# Altium PCB HardwareTutorial - Carrier_Board_Interface.PcbDoc
Units mm, origin at the board's own origin, x right, y up, seen from the top; angles counter-clockwise.
Board outline 50 x 50 mm, 2 copper layers (Top Layer, Bottom Layer); 30 components, 41 nets, 132 pads, 16 vias.
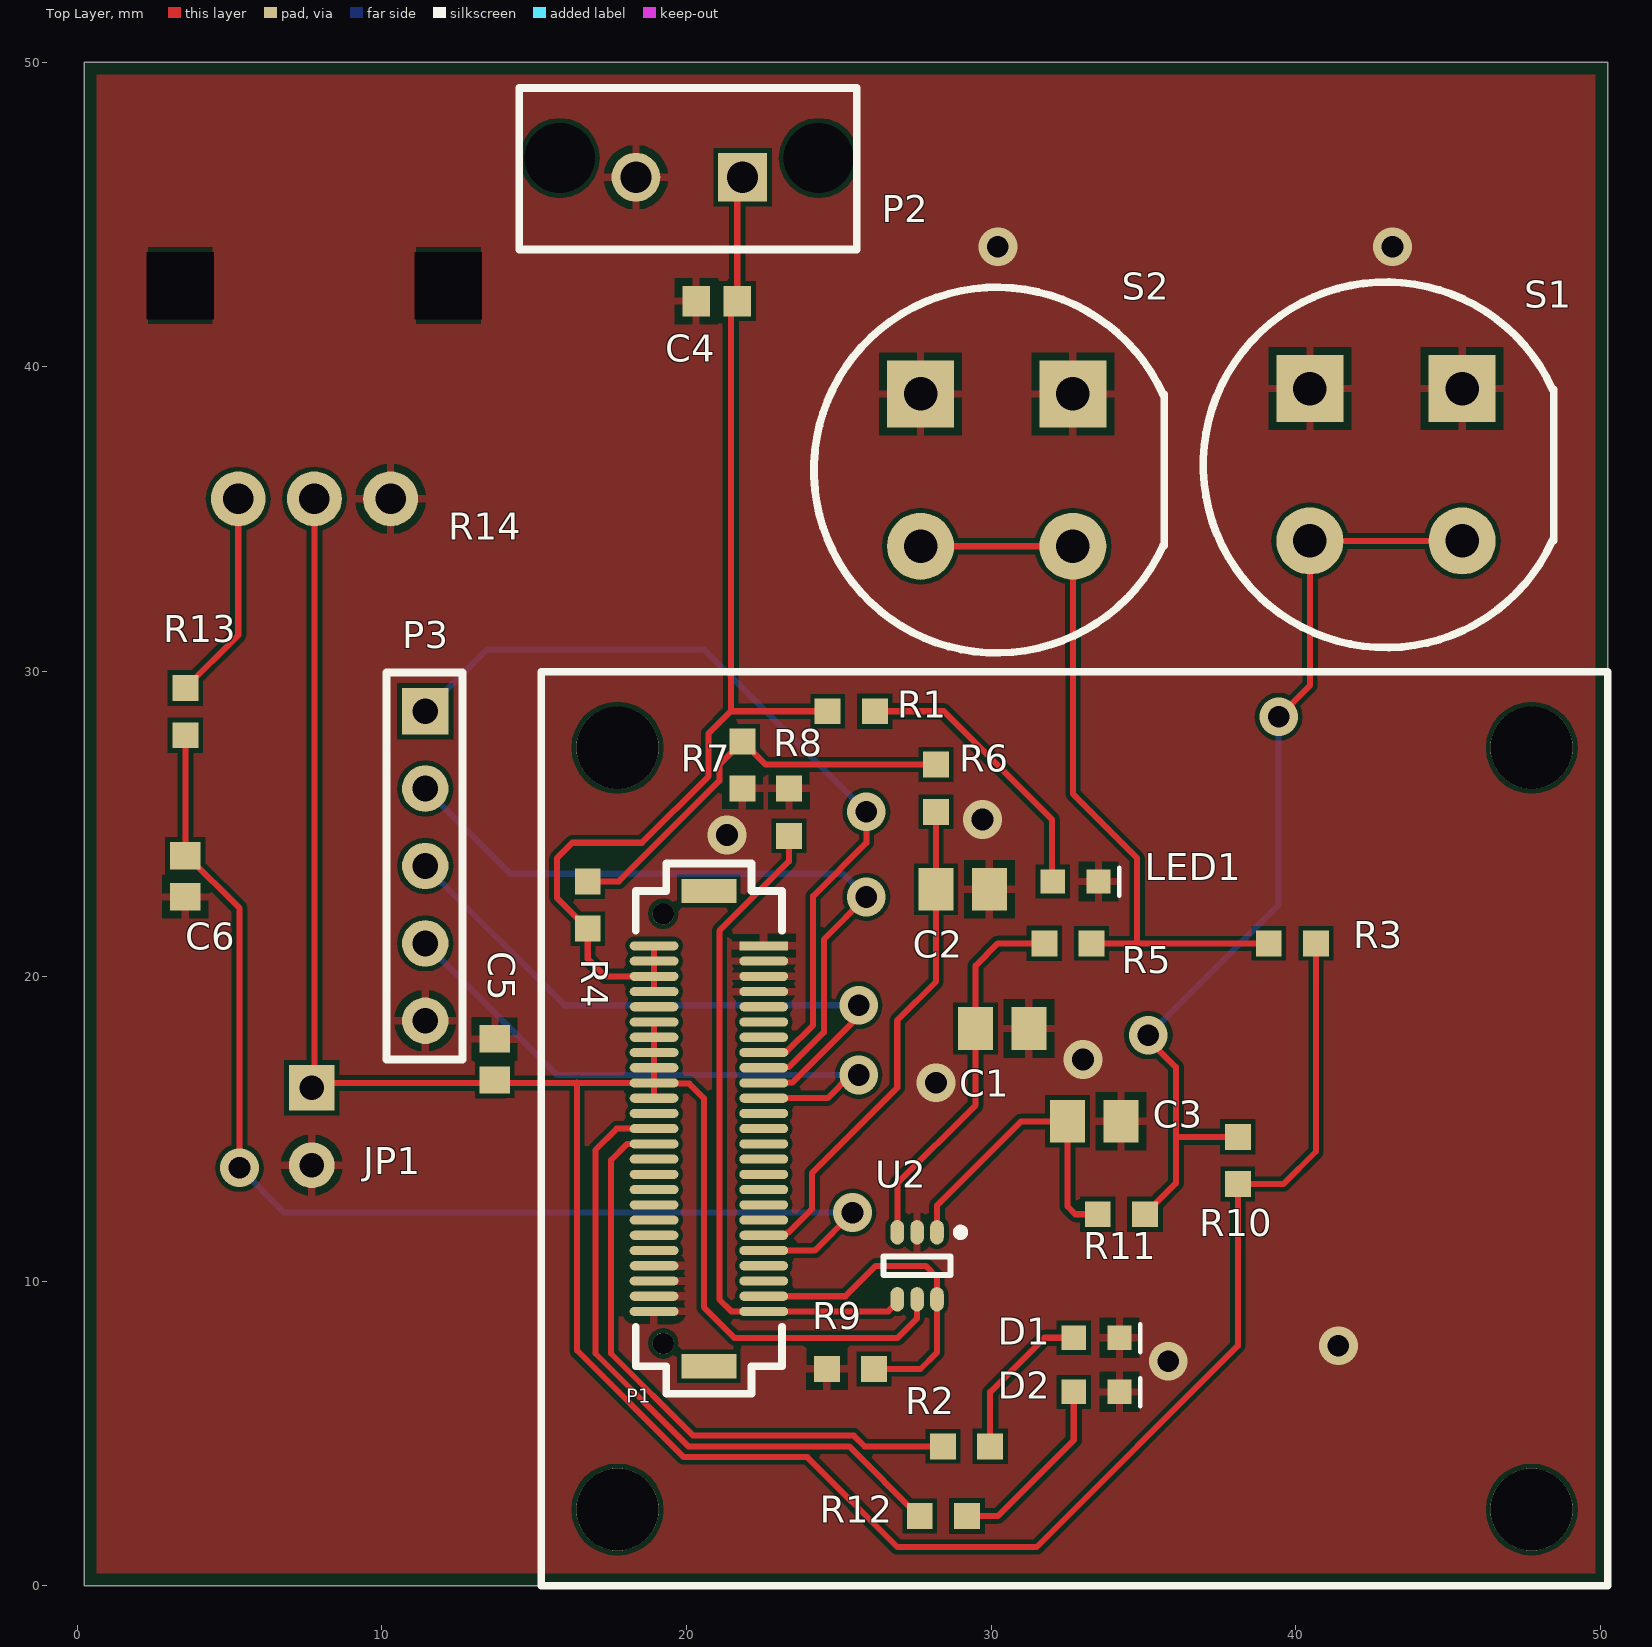
[diagram p0: Top Layer view]
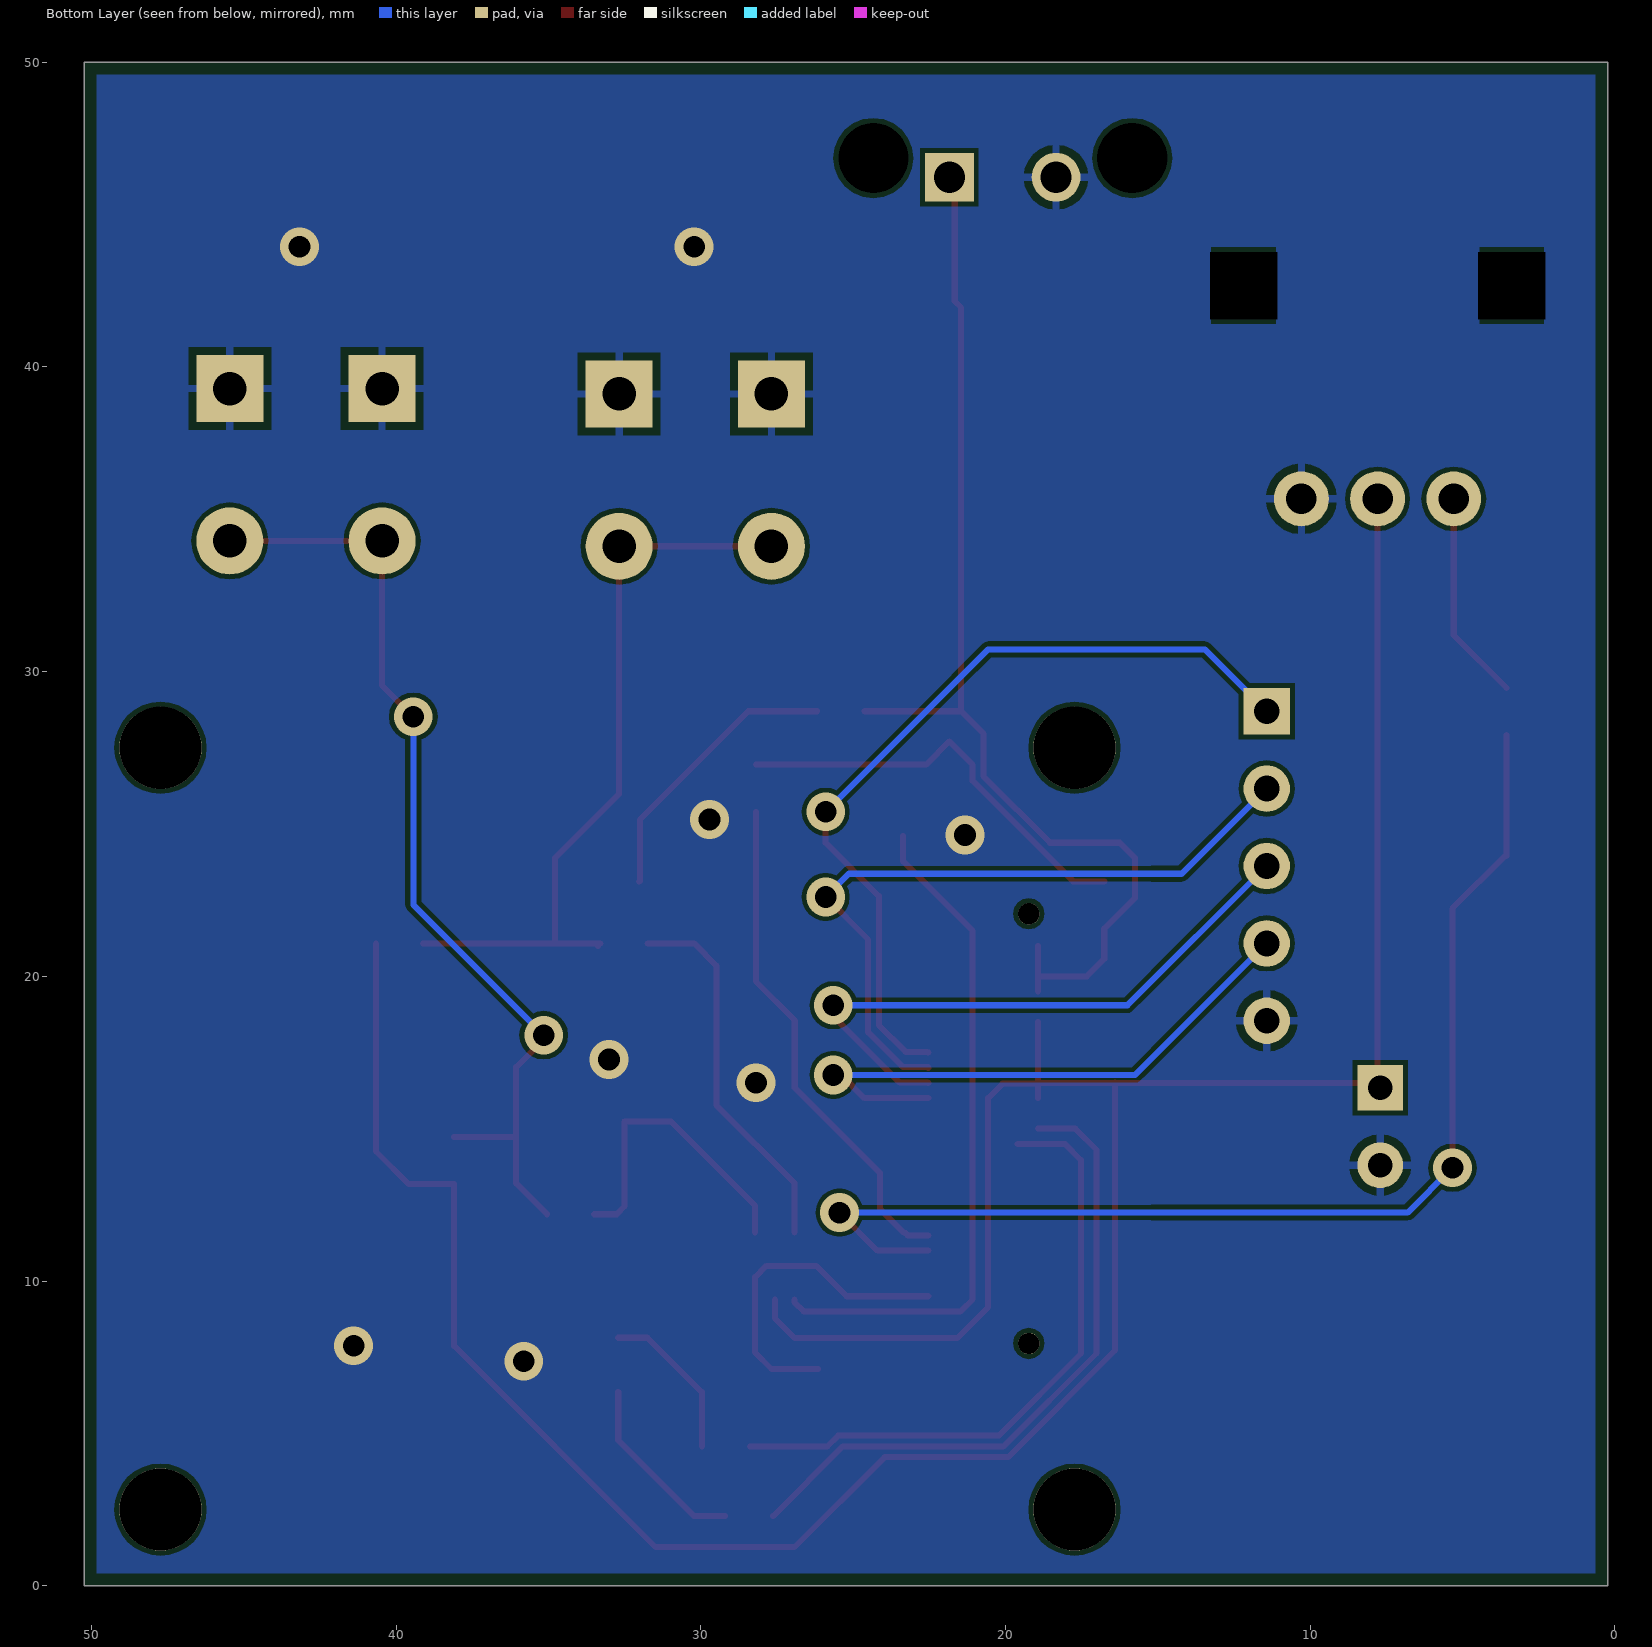
[diagram p1: Bottom Layer view, seen from below]
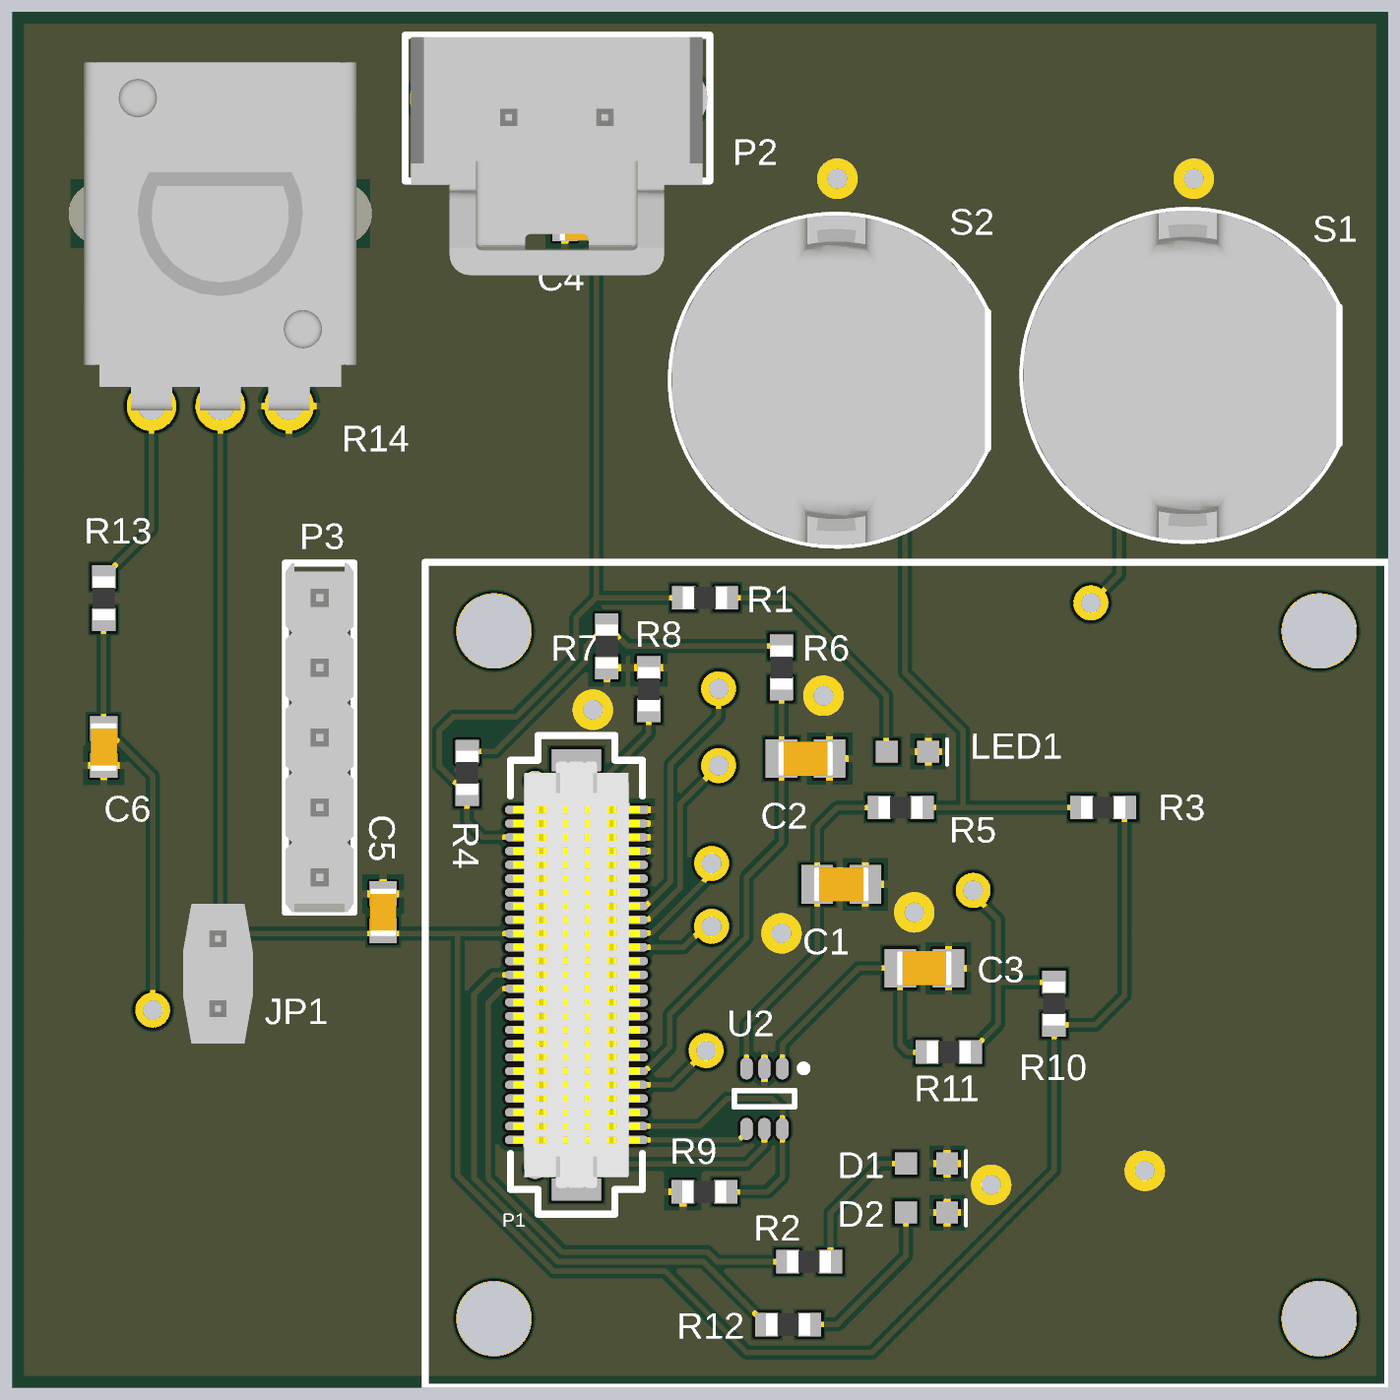
[diagram p2: 3D render of the assembled board from above, using the file's embedded part models]

## Layer stack, top to bottom
Top Solder: solder mask 0.0102, Solder Resist, Dk 3.5
Top Layer: signal copper 0.0356
Dielectric 1: dielectric 0.32, FR-4, Dk 4.8
Bottom Layer: signal copper 0.0356
Bottom Solder: solder mask 0.0102, Solder Resist, Dk 3.5

## Board outline
0.24,0 0.24,50 50.24,50 50.24,0

## Design rules (kind name [scope] priority, off if disabled: settings)
BoardOutlineClearance [All] p1: gap=0.406 ignorepadtopadclearanceinfootprint=FALSE
Clearance [All] p1: gap=0.152 ignorepadtopadclearanceinfootprint=FALSE except(0: Arc-Hole Track-Hole SMDPad-Hole THPad-Hole Via-Hole Fill-Hole Poly-Hole Region-Hole Text-Hole)
ComponentClearance ComponentClearance_ControllerBoard [InComponent('P1') vs Identifier = 'Controller_Board'] p1: gap=0 collisioncheckmode=3 verticalgap=0 showdistances=FALSE
ComponentClearance ComponentClearance_Standoffs [Identifier = 'Standoff' vs Identifier = 'Controller_Board'] p2: gap=0 collisioncheckmode=3 verticalgap=0 showdistances=FALSE
ComponentClearance [All] p3: gap=0.254 collisioncheckmode=3 verticalgap=0.254 showdistances=FALSE
HoleSize [All] p1: absolutevalues=TRUE maxlimit=6.3 minlimit=0.3 maxpercent=80.000 minpercent=20.000
MinimumAnnularRing [All] p1: minimumring=0.152
MinimumSolderMaskSliver [All] p1: minsoldermaskwidth=0.3
PolygonConnect [IsPad] p1: connectstyle=Relief reliefconductorwidth=0.254 reliefentries=4 polygonreliefangle="90 Angle" airgapwidth=0.254
PolygonConnect PolygonConnect_NoThermal [Not(IsPad)] p2: connectstyle=Direct reliefconductorwidth=0.254 reliefentries=4 polygonreliefangle="90 Angle" airgapwidth=0.254
RoutingVias [All] p1: holewidth=0.3 width=0.6 viastyle="Through Hole" minholewidth=0.3 minwidth=0.6 maxholewidth=0.711 maxwidth=1.27
SilkToSolderMaskClearance [IsPad] p1: minsilkscreentomaskgap=0.178 clearancetoexposedcopper=TRUE
SolderMaskExpansion [All] p1: expansion=0.102
Width [All] p1: maxlimit=2.54 minlimit=0.154 preferedwidth=0.2
26 further rules are at their usual default settings.

## Components (designator, comment, footprint, x,y, rotation, side; value= is the part's Value field where it differs from the comment)
C1 "CAP CER 10uF 25V 10% X5R 0805" "CAP, 0805" 30.367,18.288 r0 top
C2 "CAP CER 10uF 25V 10% X5R 0805" "CAP, 0805" 29.069,22.86 r0 top
C3 "CAP CER 10uF 25V 10% X5R 0805" "CAP, 0805" 33.387,15.24 r0 top
C4 "Cap" "CAP, 0603" 20.995,42.164 r180 top value=10μF
C5 "Cap" "CAP, 0603" 13.716,17.272 r90 top value=0.1μF
C6 "Cap" "CAP, 0603" 3.556,23.281 r90 top value=4.7μF
D1 "LED0" LED_0603 32.766,8.128 r0 top
D2 "LED0" LED_0603 32.766,6.35 r0 top
JP1 "JUMPER" "CONN, 2POS JUMPER 0.1\"" 7.706,16.342 r270 top
LED1 "LED GREEN CLEAR 2V 0603" LED_0603 32.078,23.104 r0 top
P1 "CONN 50POS Bergstak Plug 0.02\"" "CONN, BERGSTAK 50 POS PLUG" 20.74,15 r0 top locked
P2 "CONN 2POS ULTRA-FIT 0.138\"" "CONN, 2POS ULTRA-FIT" 21.844,46.228 r180 top
P3 "5POS 0.1" "CONN, 5POS HEADR 0.1\"" 11.43,28.702 r270 top
R1 "RES 4.7K OHM 1% 1/10W 0603" "RES, 0603" 25.413,28.702 r0 top
R2 "RES 10K OHM 1% 1/10W 0603" "RES, 0603" 29.197,4.572 r0 top
R3 "RES 10K OHM 1% 1/10W 0603" "RES, 0603" 39.891,21.082 r180 top
R4 "RES 10K OHM 1% 1/10W 0603" "RES, 0603" 16.764,22.339 r90 top
R5 "RES 10K OHM 1% 1/10W 0603" "RES, 0603" 32.525,21.082 r180 top
R6 "RES 10K OHM 1% 1/10W 0603" "RES, 0603" 28.194,26.175 r270 top
R7 "RES 10K OHM 1% 1/10W 0603" "RES, 0603" 21.844,26.937 r90 top
R8 "RES 10K OHM 1% 1/10W 0603" "RES, 0603" 23.368,25.387 r90 top
R9 "RES 10K OHM 1% 1/10W 0603" "RES, 0603" 25.387,7.112 r180 top
R10 "RES 10K OHM 1% 1/10W 0603" "RES, 0603" 38.1,13.957 r90 top
R11 "RES 10K OHM 1% 1/10W 0603" "RES, 0603" 34.277,12.192 r180 top
R12 "RES 10K OHM 1% 1/10W 0603" "RES, 0603" 28.435,2.286 r0 top
R13 "RES 10K OHM 1% 1/10W 0603" "RES, 0603" 3.556,28.689 r90 top
R14 "RPot" "POT 10K OHM LINEAR THROUGH HOLE" 7.792,35.672 r0 top value=20K
S1 "SPST" "SW SPST D6 SERIES GREEN" 45.466,39.29 r180 top
S2 "SPST" "SW SPST D6 SERIES BLUE" 32.686,39.116 r180 top
U2 "IC INVERTER SCHMITT 2CH 6-TSSOP" TSOP65P210X110-6N 27.574,10.498 r270 top

## Footprints (in the part's own frame and the unit in brackets; to place one, negate y for a bottom-side part, rotate by r counter-clockwise, add the part's x,y. Pads: shape width x height; smd on the part's side, far side on the other; paste and mask are expansions set on the pad)
"CAP, 0603" [mm] "Chip Capacitor, 2-Leads, Body 1.60x0.81mm, IPC Medium Density"
  rect 0.9x1 smd mask+0.076: 1(-0.675,0) 2(0.675,0)
  body extent -0.87,-0.48 0.87,0.48, height 0.9
"CAP, 0805" [mm] "Chip Capacitor, 2-Leads, Body 2.00x1.25mm, IPC Medium Density"
  rect 1.15x1.4 smd: 1(-0.875,0) 2(0.875,0)
  body extent -1,-0.63 1,0.63, height 1.25
"CONN, 2POS JUMPER 0.1\"" [mm]
  rect 1.5x1.5 hole 0.8: 1(0,0)
  round 1.5 hole 0.8: 2(2.54,0)
  body extent -1.24,-1.27 3.84,1.27, height 9.25
"CONN, 2POS ULTRA-FIT" [mm] "2 Positions Header, Shrouded Connector 0.138\" (3.50mm) Through Hole Gold"
  rect 1.6x1.6 hole 1.02: 1(0,0)
  round 1.6 hole 1.02: 2(3.5,0)
  round 1.6 hole 2.3: ""(-2.5,-0.63) ""(6,-0.63)
  silkscreen extent -3.74,-2.93 7.33,2.37, body extent -3.48,-2.87 7.12,5.79, height 13.85
"CONN, 5POS HEADR 0.1\"" [mil]
  rect 60x60 hole 33.46: 1(0,0)
  round 60 hole 33.46: 2(100,0) 3(200,0) 4(300,0) 5(400,0)
  silkscreen extent -50,-50 450,48, body extent -50,-50 450,48, height 335
"CONN, BERGSTAK 50 POS PLUG" [mm] "Bergstak 50 Position Plug"
  rect 1.6x0.3 smd: 1(1.8,6)
  oval 1.6x0.3 smd: 2(1.8,5.5) 3(1.8,5) 4(1.8,4.5) 5(1.8,4) 6(1.8,3.5) 7(1.8,3) 8(1.8,2.5) 9(1.8,2) 10(1.8,1.5) 11(1.8,1) 12(1.8,0.5) 13(1.8,0) 14(1.8,-0.5) 15(1.8,-1) 16(1.8,-1.5) 17(1.8,-2) 18(1.8,-2.5) 19(1.8,-3) 20(1.8,-3.5) 21(1.8,-4) 22(1.8,-4.5) 23(1.8,-5) 24(1.8,-5.5) 25(1.8,-6) 26(-1.8,-6) 27(-1.8,-5.5) 28(-1.8,-5) 29(-1.8,-4.5) 30(-1.8,-4) 31(-1.8,-3.5) 32(-1.8,-3) 33(-1.8,-2.5) 34(-1.8,-2) 35(-1.8,-1.5) 36(-1.8,-1) 37(-1.8,-0.5) 38(-1.8,0) 39(-1.8,0.5) 40(-1.8,1) 41(-1.8,1.5) 42(-1.8,2) 43(-1.8,2.5) 44(-1.8,3) 45(-1.8,3.5) 46(-1.8,4) 47(-1.8,4.5) 48(-1.8,5) 49(-1.8,5.5) 50(-1.8,6)
  round 0.7 hole 0.7: ""(-1.5,-7.05) ""(-1.5,7.05)
  rect 1.8x0.8 smd: ""(0,-7.8) ""(0,7.8)
  silkscreen extent -2.4,-8.7 2.4,8.7, body extent -2.3,-7.75 2.3,7.75, height 4.2
LED_0603 [mm]
  rect 0.8x0.8 smd: 1(-0.05,0.01) 2(1.45,0.01)
  silkscreen extent 2.13,-0.46 2.13,0.45, body extent -0.09,-0.39 1.51,0.41, height 0.8
"POT 10K OHM LINEAR THROUGH HOLE" [mm]
  round 1.8 hole 1: 1(0,0) 2(2.5,0) 3(-2.5,0)
  round 1.524 hole 2.2 square: 4(4.4,7) 5(-4.4,7)
  body extent -5.7,-0.15 5.7,12.5, height 14.5
"RES, 0603" [mm] "Chip Resistor, 2-Leads, Body 1.60x0.80mm, IPC Medium Density"
  rect 0.85x0.85 smd: 1(-0.775,0) 2(0.775,0)
  body extent -0.8,-0.4 0.8,0.4, height 0.55
"SW SPST D6 SERIES BLUE" [mm]
  rect 2.2x2.2 hole 1.1: 1(0,0) 1(5,0)
  round 2.2 hole 1.1: 2(0,5) 2(5,5)
  silkscreen extent -3,-3.5 8.5,8.5, body extent -2.9,-3.5 8.5,8.5, height 6.17
"SW SPST D6 SERIES GREEN" [mm]
  rect 2.2x2.2 hole 1.1: 1(0,0) 1(5,0)
  round 2.2 hole 1.1: 2(0,5) 2(5,5)
  silkscreen extent -3,-3.5 8.5,8.5, body extent -2.9,-3.5 8.5,8.5, height 6.17
TSOP65P210X110-6N [mm] "TSOP, 6-Leads, Body 2.00x1.25mm, Pitch 0.65mm, IPC Medium Density"
  oval 0.8x0.45 smd: 1(-1.1,0.65) 2(-1.1,0) 3(-1.1,-0.65) 4(1.1,-0.65) 5(1.1,0) 6(1.1,0.65)
  silkscreen extent -1.22,-1.1 0.3,1.55, body extent -0.7,-1.1 0.7,1.1, height 1.1

## Part data
C1 C3: "10μF ±10% 25V Ceramic Capacitor X5R 0805 (2012 Metric)", Capacitance=10μF, Manufacturer="Murata Electronics North America", Manufacturer Part Number=GRM21BR61E106KA73L, Operating Temperature="-55°C ~ 85°C", Package / Case="0805 (2012 Metric)", Ratings=-, Supplier Part Number 1=490-5523-1-ND, Temperature Coefficient=X5R, Tolerance=±10%, Voltage - Rated=25V, Applications="General Purpose", Category=Capacitors, ComponentLink1Description=http://search.murata.co.jp/Ceramy/image/img/A01X/G101/ENG/GRM21BR61E106KA73-01.pdf, ComponentLink1URL=http://search.murata.co.jp/Ceramy/image/img/A01X/G101/ENG/GRM21BR61E106KA73-01.pdf, Features=-, Height - Seated (Max)=-, Lead Spacing=-, Lead Style=-, Mounting Type="Surface Mount, MLCC", Packaging="Cut Tape (CT)", Part Status=Active, Pricing 1="1=0.3, 10=0.214, 100=0.1008, 500=0.07068, 1000=0.05851 (CAD)", RoHS="RoHS Compliant", Size / Dimension="0.079\" L x 0.049\" W (2.00mm x 1.25mm)", Stock 1=1695157, Supplier 1=Digi-Key, Thickness (Max)="0.053\" (1.35mm)"
C2: "10μF ±10% 25V Ceramic Capacitor X5R 0805 (2012 Metric)", Capacitance=0.1μF, Manufacturer="Murata Electronics North America", Manufacturer Part Number=GRM21BR61E106KA73L, Operating Temperature="-55°C ~ 85°C", Package / Case="0805 (2012 Metric)", Ratings=-, Supplier Part Number 1=490-5523-1-ND, Temperature Coefficient=X5R, Tolerance=±10%, Voltage - Rated=25V, Applications="General Purpose", Category=Capacitors, ComponentLink1Description=http://search.murata.co.jp/Ceramy/image/img/A01X/G101/ENG/GRM21BR61E106KA73-01.pdf, ComponentLink1URL=http://search.murata.co.jp/Ceramy/image/img/A01X/G101/ENG/GRM21BR61E106KA73-01.pdf, Features=-, Height - Seated (Max)=-, Lead Spacing=-, Lead Style=-, Mounting Type="Surface Mount, MLCC", Packaging="Cut Tape (CT)", Part Status=Active, Pricing 1="1=0.3, 10=0.214, 100=0.1008, 500=0.07068, 1000=0.05851 (CAD)", RoHS="RoHS Compliant", Size / Dimension="0.079\" L x 0.049\" W (2.00mm x 1.25mm)", Stock 1=1695157, Supplier 1=Digi-Key, Thickness (Max)="0.053\" (1.35mm)"
C4 C5 C6: "Capacitor", LatestRevisionDate=17-Jul-2002, LatestRevisionNote="Re-released for DXP Platform.", PackageDescription="Radial Cap, Thru-Hole; 2 Leads; 0.3 in Pin Spacing", PackageReference=RAD-0.3, Published=8-Jun-2000, Publisher="Altium Limited"
D1 D2: "Typical INFRARED GaAs LED", LatestRevisionDate=08-Jul-2005, LatestRevisionNote="Mech Layer 1 removed.", PackageDescription="LED; 2 Leads", PackageReference=LED-0, Published=8-Jun-2000, Publisher="Altium Limited"
JP1: library part "CONN 2POS JUMPER 0.1\"", "2 Positions Header Connector Through Hole Gold", Current Rating=2A, Insulation Color=Black, Manufacturer="Omron Electronics Inc-EMC Div", Manufacturer Part Number=XG8T-0231, Material Flammability Rating="UL94 V-0", Operating Temperature="-55°C ~ 105°C", Supplier Part Number 1=XG8T-0231-ND, Voltage Rating=300V, Applications=-, Category="Connectors, Interconnects", ComponentLink1Description=http://www.omron.com/ecb/products/pdf/en-xj8.pdf, ComponentLink1URL=http://www.omron.com/ecb/products/pdf/en-xj8.pdf, Connector Type=Header, Contact Finish - Mating=Gold, Contact Finish - Post=Tin, Contact Finish Thickness - Mating="5.9μin (0.15μm)", Contact Finish Thickness - Post=-, Contact Length - Mating="0.169\" (4.30mm)", Contact Length - Post="0.118\" (3.00mm)", Contact Material="Brass, Nickel", Contact Shape=Square, Contact Type="Male Pin", Fastening Type=-, Features=-, Ingress Protection=-, Insulation Height="0.098\" (2.50mm)", Insulation Material="Polybutylene Terephthalate (PBT), Glass Filled", Mated Stacking Heights=-, Mounting Type="Through Hole", Number of Positions=2, Number of Positions Loaded=All, Number of Rows=2, Overall Contact Length="0.386\" (9.80mm)", Packaging=Bulk, Part Status=Active, Pitch - Mating=-, Pricing 1="1=0.28, 10=0.265, 100=0.183, 500=0.15484, 1000=0.12668, 5000=0.11261, 10000=0.10205 (CAD)", RoHS="RoHS Compliant", Row Spacing - Mating="0.100\"", Shrouding=Unshrouded, Stock 1=9094, Style="Board to Board or Cable", Supplier 1=Digi-Key, Termination=Solder, Type=JUMPER
LED1: "Green 572nm LED Indication - Discrete 2V 0603 (1608 Metric)", Color=Green, Current - Test=20mA, Lens Color=Colorless, Manufacturer="Wurth Electronics Inc.", Manufacturer Part Number=150060VS75000, Millicandela Rating=40mcd, Package / Case="0603 (1608 Metric)", Supplier Device Package=0603, Supplier Part Number 1=732-4980-1-ND, Voltage - Forward (Vf) (Typ)=2V, Category=Optoelectronics, ComponentLink1Description=http://katalog.we-online.de/led/datasheet/150060VS75000.pdf, ComponentLink1URL=http://katalog.we-online.de/led/datasheet/150060VS75000.pdf, Features=-, Height (Max)=0.80mm, Lens Style/Size="Rectangle with Flat Top, 1.10mm x 0.70mm", Lens Transparency=Clear, Mounting Type="Surface Mount", Packaging="Cut Tape (CT)", Part Status=Active, Pricing 1="1=0.21, 100=0.1617, 500=0.13964 (CAD)", RoHS="RoHS Compliant", Size / Dimension="1.60mm L x 0.80mm W", Stock 1=9408, Supplier 1=Digi-Key, Viewing Angle=140°, Wavelength - Dominant=570nm, Wavelength - Peak=572nm
P1: "50 Position Connector Plug, Outer Shroud Contacts Surface Mount Gold", Manufacturer 1="Amphenol FCI", Manufacturer Part Number 1=10132797-055100LF, Supplier Part Number 1=609-5226-1-ND, ComponentLink1Description=http://portal.fciconnect.com/Comergent//fci/drawing/10132797.pdf, ComponentLink1URL=http://portal.fciconnect.com/Comergent//fci/drawing/10132797.pdf, Connector Type="Plug, Outer Shroud Contacts", Contact Finish=Gold, Contact Finish Thickness="1μin (0.025μm)", Height Above Board="0.169\" (4.30mm)", Mated Stacking Heights=5mm, Mounting Type="Surface Mount", Number of Positions=50, Number of Rows=2, Packaging="Cut Tape (CT)", Part Status=Active, Pitch="0.020\" (0.50mm)", Series="BergStak Plug", Supplier 1=Digi-Key
P2: "Connector Header Through Hole 2 position 0.138\" (3.50mm)", Color=Black, Manufacturer=Molex, Manufacturer Part Number=1722871102, Supplier Part Number 1=WM11701-ND, ComponentLink1Description=http://www.molex.com/pdm_docs/sd/1722861302_sd.pdf, ComponentLink1URL=http://www.molex.com/pdm_docs/sd/1722861302_sd.pdf, Connector Type="Male Pin", Contact Plating=Tin, Fastening Type=Latch, Mount="Through Hole", Number of Positions=2, Number of Rows=1, Packaging=Tray, Pitch=0.138inch, Pricing 1="1 = 0.78000, 10 = 0.68800, 100 = 0.59380, 500 = 0.48582, 1000 = 0.43184, 5000 = 0.37786, 10000 = 0.35897 (USD)", RoHS=Yes, Series=UltraFit, Stock 1=2743, Supplier 1=Digi-Key, Termination=Solder
P3: library part "CONN 5POS HEADR MALE 0.1in", "5 Positions Header, Breakaway Connector 0.100\" (2.54mm) Through Hole Tin", Colour=Black, Contact Resistance=20mR, Manufacturer 1=Molex, Manufacturer Part Number 1=0022284050, Max Operating Temperature=75°C, Max Voltage Rating (AC)=250V, Min Operating Temperature=0°C, Supplier Part Number 1=WM50014-05-ND, ComponentLink1Description=https://datasheet.ciiva.com/6814/022284363-sd-6814049.pdf, ComponentLink1URL=https://datasheet.ciiva.com/6814/022284363-sd-6814049.pdf, ComponentLink2Description=https://datasheet.ciiva.com/14804/179390022284050-pcb-headers-14804361.pdf, ComponentLink2URL=https://datasheet.ciiva.com/14804/179390022284050-pcb-headers-14804361.pdf, ComponentLink3Description=https://datasheet.ciiva.com/15217/getdatasheetpartid-256138-15217709.pdf, ComponentLink3URL=https://datasheet.ciiva.com/15217/getdatasheetpartid-256138-15217709.pdf, Connector Type="Male Pin", Contact Material=Bronze,Brass, Contact Mating Length=0.24inch, Contact Plating=Nickel,Tin, Depth=2.49mm, Description 1="Conn Unshrouded Header HDR 5 POS 2.54mm Solder ST Thru-Hole KK? Bag", Gender=Male, Housing Colour=Black, Housing Material=Nylon, Length=12.7mm, Max Voltage Rating (DC)=250V, Mount="Through Hole", Number of Contacts=5, Number of Positions=5, Number of Rows=1, Orientation=Straight, Packaging=Bulk, Pitch=2.54mm, Pricing 1="1=0.22, 10=0.21, 25=0.1796, 50=0.157, 100=0.1459, 250=0.129, 500=0.1234 (USD)", Stock 1=3161, Supplier 1=Digi-Key, Termination=Solder
R1: "4.7k Ohm ±1% 0.1W, 1/10W Chip Resistor 0603 (1608 Metric) Moisture Resistant Thick Film", Manufacturer 1=Yageo, Manufacturer Part Number 1=RC0603FR-074K7L, Operating Temperature="-55°C ~ 155°", Package / Case="0603 (1608 Metric)", Power (Watts)=1/10W, Resistance (Ohms)=4.7k, Supplier Device Package=0603, Supplier Part Number 1=311-4.70KHRCT-ND, Temperature Coefficient=±100ppm/°, Tolerance=±1%, Category=Resistors, ComponentLink1Description=http://www.yageo.com/documents/recent/PYu-RC_Group_51_RoHS_L_7.pdf, ComponentLink1URL=http://www.yageo.com/documents/recent/PYu-RC_Group_51_RoHS_L_7.pdf, Composition="Thick Film", Description 1="RES SMD 4.7K OHM 1% 1/10W 0603", Failure Rate=-, Features="Moisture Resistant", Height - Seated (Max)="0.022\" (0.55mm)", Packaging="Cut Tape (CT)", Part Status=Active, Pricing 1="1=0.16, 10=0.022, 100=0.0089, 1000=0.00402, 2500=0.00349 (CAD)", RoHS="RoHS Compliant", Size / Dimension="0.063\" L x 0.031\" W (1.60mm x 0.80mm)", Stock 1=3487566, Supplier 1=Digi-Key
R2 R12: "RES SMD 10K OHM 1% 1/10W 0603", Manufacturer 1=Yageo, Manufacturer Part Number 1=RC0603FR-0710KL, Operating Temperature="-55°C ~ 155°", Package / Case="0603 (1608 Metric)", Power=1/10W, Resistance=100, Supplier Device Package=0603, Supplier Part Number 1=311-10.0KHRCT-ND, Temperature Coefficient=±100ppm/°, Tolerance=±1%, ComponentLink1Description=http://www.yageo.com/documents/recent/PYu-RC_Group_51_RoHS_L_7.pdf, ComponentLink1URL=http://www.yageo.com/documents/recent/PYu-RC_Group_51_RoHS_L_7.pdf, Composition="Thick Film", Failure Rate=-, Height - Seated (Max)="0.022\" (0.55mm)", Packaging="Cut Tape (CT)", Part Status=Active, Size / Dimension="0.063\" L x 0.031\" W (1.60mm x 0.80mm)", Supplier 1=Digi-Key
R3 R4 R6 R8 R9 R10: "RES SMD 10K OHM 1% 1/10W 0603", Manufacturer 1=Yageo, Manufacturer Part Number 1=RC0603FR-0710KL, Operating Temperature="-55°C ~ 155°", Package / Case="0603 (1608 Metric)", Power=1/10W, Resistance=10k, Supplier Device Package=0603, Supplier Part Number 1=311-10.0KHRCT-ND, Temperature Coefficient=±100ppm/°, Tolerance=±1%, ComponentLink1Description=http://www.yageo.com/documents/recent/PYu-RC_Group_51_RoHS_L_7.pdf, ComponentLink1URL=http://www.yageo.com/documents/recent/PYu-RC_Group_51_RoHS_L_7.pdf, Composition="Thick Film", Failure Rate=-, Height - Seated (Max)="0.022\" (0.55mm)", Packaging="Cut Tape (CT)", Part Status=Active, Size / Dimension="0.063\" L x 0.031\" W (1.60mm x 0.80mm)", Supplier 1=Digi-Key
R5 R11: "RES SMD 10K OHM 1% 1/10W 0603", Manufacturer 1=Yageo, Manufacturer Part Number 1=RC0603FR-0710KL, Operating Temperature="-55°C ~ 155°", Package / Case="0603 (1608 Metric)", Power=1/10W, Resistance=1.6k, Supplier Device Package=0603, Supplier Part Number 1=311-10.0KHRCT-ND, Temperature Coefficient=±100ppm/°, Tolerance=±1%, ComponentLink1Description=http://www.yageo.com/documents/recent/PYu-RC_Group_51_RoHS_L_7.pdf, ComponentLink1URL=http://www.yageo.com/documents/recent/PYu-RC_Group_51_RoHS_L_7.pdf, Composition="Thick Film", Failure Rate=-, Height - Seated (Max)="0.022\" (0.55mm)", Packaging="Cut Tape (CT)", Part Status=Active, Size / Dimension="0.063\" L x 0.031\" W (1.60mm x 0.80mm)", Supplier 1=Digi-Key
R7: "RES SMD 10K OHM 1% 1/10W 0603", Manufacturer 1=Yageo, Manufacturer Part Number 1=RC0603FR-0710KL, Operating Temperature="-55°C ~ 155°", Package / Case="0603 (1608 Metric)", Power=1/10W, Resistance=3.3k, Supplier Device Package=0603, Supplier Part Number 1=311-10.0KHRCT-ND, Temperature Coefficient=±100ppm/°, Tolerance=±1%, ComponentLink1Description=http://www.yageo.com/documents/recent/PYu-RC_Group_51_RoHS_L_7.pdf, ComponentLink1URL=http://www.yageo.com/documents/recent/PYu-RC_Group_51_RoHS_L_7.pdf, Composition="Thick Film", Failure Rate=-, Height - Seated (Max)="0.022\" (0.55mm)", Packaging="Cut Tape (CT)", Part Status=Active, Size / Dimension="0.063\" L x 0.031\" W (1.60mm x 0.80mm)", Supplier 1=Digi-Key
R13: "RES SMD 10K OHM 1% 1/10W 0603", Manufacturer 1=Yageo, Manufacturer Part Number 1=RC0603FR-0710KL, Operating Temperature="-55°C ~ 155°C", Package / Case="0603 (1608 Metric)", Power=1/10W, Resistance=1.6k, Supplier Device Package=0603, Supplier Part Number 1=311-10.0KHRCT-ND, Temperature Coefficient=±100ppm/°C, Tolerance=±1%, ComponentLink1Description=http://www.yageo.com/documents/recent/PYu-RC_Group_51_RoHS_L_7.pdf, ComponentLink1URL=http://www.yageo.com/documents/recent/PYu-RC_Group_51_RoHS_L_7.pdf, Composition="Thick Film", Failure Rate=-, Height - Seated (Max)="0.022\" (0.55mm)", Packaging="Cut Tape (CT)", Part Status=Active, Size / Dimension="0.063\" L x 0.031\" W (1.60mm x 0.80mm)", Supplier 1=Digi-Key
R14: "Potentiometer", LatestRevisionDate=17-Jul-2002, LatestRevisionNote="Re-released for DXP Platform.", PackageDescription="Variable Resistor, Thru-Hole; 3 Leads", PackageReference=VR5, Published=8-Jun-2000, Publisher="Altium Limited", Set Position=0.5, Sim Note="Enter the Resistance value and the set point into parameter fields."
S1: library part "SW SPST-NO 0.1A 32V D6 Series Green", "Pushbutton Switch SPST-NO Keyswitch Through Hole D6 Series Green", Color - Actuator/Cap=Green, Current Rating="100mA (DC)", Illumination Type, Color=-, Manufacturer=C&K, Manufacturer Part Number="D6R50 F1 LFS", Operating Temperature="-20°C ~ 85°", Supplier Part Number 1=401-1976-ND, Voltage Rating - DC=32V, Actuator Type="Round, Button", Category=Switches, Circuit=SPST-NO, ComponentLink1Description=http://www.ckswitches.com/media/1341/d6.pdf, ComponentLink1URL=http://www.ckswitches.com/media/1341/d6.pdf, Electrical Life="250,000 Cycles", Features="Tactile Feedback", Illumination Voltage (Nominal)=-, Ingress Protection=-, Mechanical Life=-, Mounting Type="Through Hole", Packaging=Bulk, Panel Cutout Dimensions=-, Part Status=Active, Pricing 1="1=1.73, 10=1.607, 25=1.5308, 50=1.454, 100=1.4158, 250=1.37756, 500=1.30102, 1000=1.22448, 5000=1.03316 (CAD)", RoHS="RoHS Compliant", Stock 1=3742, Supplier 1=Digi-Key, Switch Function=Off-Mom, Termination Style="PC Pin", Type=Keyswitch, Voltage Rating - AC=-
S2: library part "SW SPST-NO 0.1A 32V D6 Series Blue", "Pushbutton Switch SPST-NO Keyswitch Through Hole D6 Series Blue", Color - Actuator/Cap=Blue, Current Rating="100mA (DC)", Illumination Type, Color=-, Manufacturer=C&K, Manufacturer Part Number="D6R60 F1 LFS", Operating Temperature="-20°C ~ 85°", Supplier Part Number 1=401-1977-ND, Voltage Rating - DC=32V, Actuator Type="Round, Button", Category=Switches, Circuit=SPST-NO, ComponentLink1Description=http://www.ckswitches.com/media/1341/d6.pdf, ComponentLink1URL=http://www.ckswitches.com/media/1341/d6.pdf, Electrical Life="250,000 Cycles", Features="Tactile Feedback", Illumination Voltage (Nominal)=-, Ingress Protection=-, Mechanical Life=-, Mounting Type="Through Hole", Packaging=Bulk, Panel Cutout Dimensions=-, Part Status=Active, Pricing 1="1=1.73, 10=1.607, 25=1.5308, 50=1.454, 100=1.4158, 250=1.37756, 500=1.30102, 1000=1.22448, 5000=1.03316 (CAD)", RoHS="RoHS Compliant", Stock 1=3385, Supplier 1=Digi-Key, Switch Function=Off-Mom, Termination Style="PC Pin", Type=Keyswitch, Voltage Rating - AC=-
U2: Supplier Part Number 1=1727-2072-1-ND, Supplier 1=Digi-Key

## Free pads (board coordinates)
  round 2.7 hole 2.7: ""(17.74,2.5) ""(17.74,27.5) ""(47.74,2.5) ""(47.74,27.5)

## Via types
v1: diameter 1.27, hole 0.711, Top Layer to Bottom Layer, 16 vias

## Nets (pads, with @x,y where several pads share a name; then routed paths per layer and width w, separated by ;. In a path a pad name is that pad's centre, name@x,y a point inside that pad or via, vN(x,y) a via of type N, cw(c..) or ccw(c..) an arc to the next point about the centre after c; other vN are vias at no path point)
3V3: C5.1 JP1.1 P1.40 P1.41 P1.42 P1.43 P1.44 P1.45 R3.1 R10.1 R14.1 U2.5 | length 101.3
  Top Layer w0.2: JP1.1@7.452,16.342 JP1.1@7.624,16.514 ; JP1.1 JP1.1@7.792,16.428 ; R14.1 JP1.1@7.792,16.428 ; 16.412,16.51 16.412,16.5 ; P1.40 P1.41 ; P1.45 P1.44 P1.43 P1.42 P1.41 ; U2.5 27.574,8.773 26.929,8.128 21.59,8.128 20.574,9.144 20.574,16.002 20.095,16.481 18.959,16.481 P1.41 ; 38.108,10.66 38.1,10.668 ; R3.1 40.666,14.25 39.598,13.182 R10.1 38.1,10.668 ; JP1.1@7.792,16.428 7.864,16.5 16.412,16.5 ; 16.412,16.5 16.412,7.718 19.91,4.22 23.974,4.22 26.924,1.27 31.496,1.27 38.1,7.874 38.1,10.668 ; 16.412,16.5 P1.41
GND: C1.2 C2.2 C3.2 C4.2 C5.2 C6.1 D1.2 D2.2 JP1.2 LED1.2 P1.1 P1.2 P1.3 P1.4 P1.26 P1.27 P1.28 P1.29 P2.2 P3.5 R7.1 R8.2 R9.2 R14.2 S1.1 S2.1 U2.2 | length 0.2
  Top Layer w0.2: S2.1@31.67,39.196 S2.1@31.832,39.358
  other v1: 35.814,7.366 41.402,7.874 28.194,16.51 33.02,17.272 21.336,24.638 29.718,25.146 30.226,43.942 43.18,43.942
Net_2: R3.2 R5.1 S2.2 | length 26.6
  Top Layer w0.2: S2.2@27.686,34.116 32.686,34.116 32.686,25.988 34.798,23.876 34.798,21.082 ; S2.2@27.686,34.196 S2.2@28.448,34.196 ; S2.2@31.67,34.196 S2.2@32.686,34.196 ; R5.1@33.38,21.002 R5.1 34.798,21.082 ; R3.2 34.798,21.082
NetC1_1: C1.1 R5.2 U2.3 | length 12.4
  Top Layer w0.2: U2.3 26.924,13.208 29.492,15.776 C1.1 29.492,20.348 30.226,21.082 R5.2
NetC3_1: C3.1 R11.2 U2.1 | length 10.2
  Top Layer w0.2: U2.1 28.224,12.476 30.988,15.24 C3.1 32.512,12.446 32.766,12.192 R11.2
NetD1_1: D1.1 R2.2 | length 5.3
  Top Layer w0.2: R2.2 29.972,6.35 31.76,8.138 D1.1
NetD2_1: D2.1 R12.2 | length 6.1
  Top Layer w0.2: R12.2 30.226,2.286 32.716,4.776 D2.1
NetLED1_1: LED1.1 R1.2 | length 9.3
  Top Layer w0.2: R1.2 28.448,28.702 32.004,25.146 32.004,23.138 LED1.1
NetR4_2: R4.2 R6.1 R7.2 | length 14
  Top Layer w0.2: R4.2 17.78,23.114 21.082,26.416 21.082,26.95 R7.2 22.606,26.95 R6.1
NetR10_2: R10.2 R11.1 S1.2 | length 31.9
  Top Layer w0.2: R11.1 36.068,13.208 36.068,14.732 ; v1(35.163,18.068) 35.163,17.923 36.068,17.018 36.068,14.732 ; R10.2 36.068,14.732 ; v1@39.624,28.702 40.466,29.544 40.466,34.29 S1.2@45.466,34.29
  Bottom Layer w0.2: v1(35.163,18.068) 39.442,22.348 v1(39.442,28.52)
NetR13_2: R13.2 R14.3 | length 6.9
  Top Layer w0.2: R13.2 5.292,31.2 R14.3
PA0_BUTTON_1_IN: P1.25 R8.1 U2.4 | length 22.4
  Top Layer w0.2: R8.1 23.368,23.771 21.087,21.49 21.087,9.393 21.48,9 P1.25 26.633,9 26.924,9.291 U2.4
PA1_BUTTON_2_IN: P1.24 R9.1 U2.6 | length 11
  Top Layer w0.2: P1.24 25.219,9.5 26.217,10.498 27.856,10.498 28.224,10.13 U2.6 28.224,7.65 27.686,7.112 R9.1
PA2/AN2/USART2_TX: P1.23
PA3/AN3/USART2_RX: P1.22
PA4/AN4/SPI1_NSS: C6.2 P1.21 R13.1 | length 39.1
  Top Layer w0.2: R13.1 C6.2 3.606,23.956 5.334,22.228 v1(5.334,13.716) ; P1.21 24.208,11 v1(25.454,12.246)
  Bottom Layer w0.2: v1(5.334,13.716) 6.804,12.246 v1(25.454,12.246)
PA5/AN5/SPI1_SCK: C2.1 P1.20 R6.2 | length 16.7
  Top Layer w0.2: P1.20 23.217,11.5 23.315,11.598 23.357,11.598 24.13,12.371 24.13,13.551 26.922,16.344 26.922,18.554 28.194,19.825 C2.1 R6.2
PA6/AN6/SPI1_MISO: P1.19
PA7/AN7/SPI1_MOSI: P1.18
PA8: P1.7
PA9: P1.6
PA10: P1.5
PA15/LED_RED: P1.39
PB0/AN8: P1.17
PB1/AN9: P1.16
PB2: P1.15
PB3/LED_GREEN: P1.38 R12.1 | length 21.7
  Top Layer w0.2: P1.38 17.713,15 17.018,14.305 17.018,7.62 20.066,4.572 25.349,4.572 R12.1@27.635,2.286
PB4/LED_BLUE: P1.37 R2.1 | length 20.8
  Top Layer w0.2: P1.37@19.617,14.5 P1.37 18.056,14.5 17.526,13.97 17.526,7.62 20.222,4.924 25.495,4.924 25.847,4.572 R2.1@28.397,4.572
PB5/LED_BLUE: P1.36
PB6/USART1_TX: P1.34
PB7/USART1_RX: P1.33
PB8/I2C1_SCL: P1.32
PB9/I2C1_SDA: P1.31
PB10/USART3_TX/I2C2_SCL: P1.14
PB11/USART3_RX/I2C2_SDA: P1.13
PB12/SPI2_NSS: P1.11 P3.4 | length 19.7
  Top Layer w0.2: P1.11 24.638,16 25.402,16.764 v1(25.654,16.764) v1@25.908,16.764
  Bottom Layer w0.2: P3.4 15.748,16.764 v1(25.654,16.764)
PB13/SPI2_SCK: P1.10 P3.3 | length 20.5
  Top Layer w0.2: P1.10 22.559,16.519 23.487,16.519 25.654,18.686 v1(25.654,19.05)
  Bottom Layer w0.2: P3.3 16.002,19.05 v1(25.654,19.05)
PB14/SPI2_MISO: P1.9 P3.2 | length 23.4
  Top Layer w0.2: P1.9 22.558,17.018 23.368,17.018 24.511,18.161 24.511,21.209 v1(25.908,22.606)
  Bottom Layer w0.2: P3.2 14.224,23.368 25.146,23.368 v1(25.908,22.606)
PB15/SPI2_MOSI: P1.8 P3.1 | length 27.2
  Top Layer w0.2: P1.8 22.559,17.519 23.278,17.519 24.159,18.4 24.159,22.635 25.908,24.384 v1(25.908,25.4)
  Bottom Layer w0.2: P3.1 13.462,30.734 20.574,30.734 v1(25.908,25.4)
PC13: P1.30
VBAT: C4.1 P1.47 P1.48 P1.49 P1.50 P2.1 R1.1 R4.1 | length 37
  Top Layer w0.2: P1.47 P1.48 ; P1.50 P1.49 P1.48 ; P2.1 21.67,46.054 C4.1 21.459,41.953 21.459,28.702 ; R1.1 21.459,28.702 ; P1.48 17.338,20 16.764,20.574 R4.1 15.748,22.58 15.748,23.876 16.256,24.384 18.542,24.384 20.73,26.572 20.73,27.973 21.459,28.702
pads on no net: P1. P1.12 P1.35 P1.46 P2. R14.4 R14.5

## Polygon pours and split planes (outlines as drawn)
GND on Bottom Layer (solid, pour order 6): 50.292,50.038 50.292,0.052 50.24,0 0.254,0 0.254,50.038
GND on Bottom Layer (solid, pour order 0): 15.24,30 50.24,30 50.24,0 15.24,0
GND on Top Layer (solid, pour order 4): 0.182,50.06 50.22,50.06 50.22,0.074 50.168,0.022 0.182,0.022 0.182,50.06 0.144,50.022
GND on Top Layer (solid, pour order 2): 14.067,29.953 49.067,29.953 49.067,-0.047 14.067,-0.047

## Silkscreen, mask and mechanical layers (free items; w line width, h text height)
Top Overlay:
  lines w0.254: 15.24,0 50.24,0 50.24,30 15.24,30 15.24,0